# EAGLE board magnetorquer_extension_board_f1 (EAGLE 8.7.1)
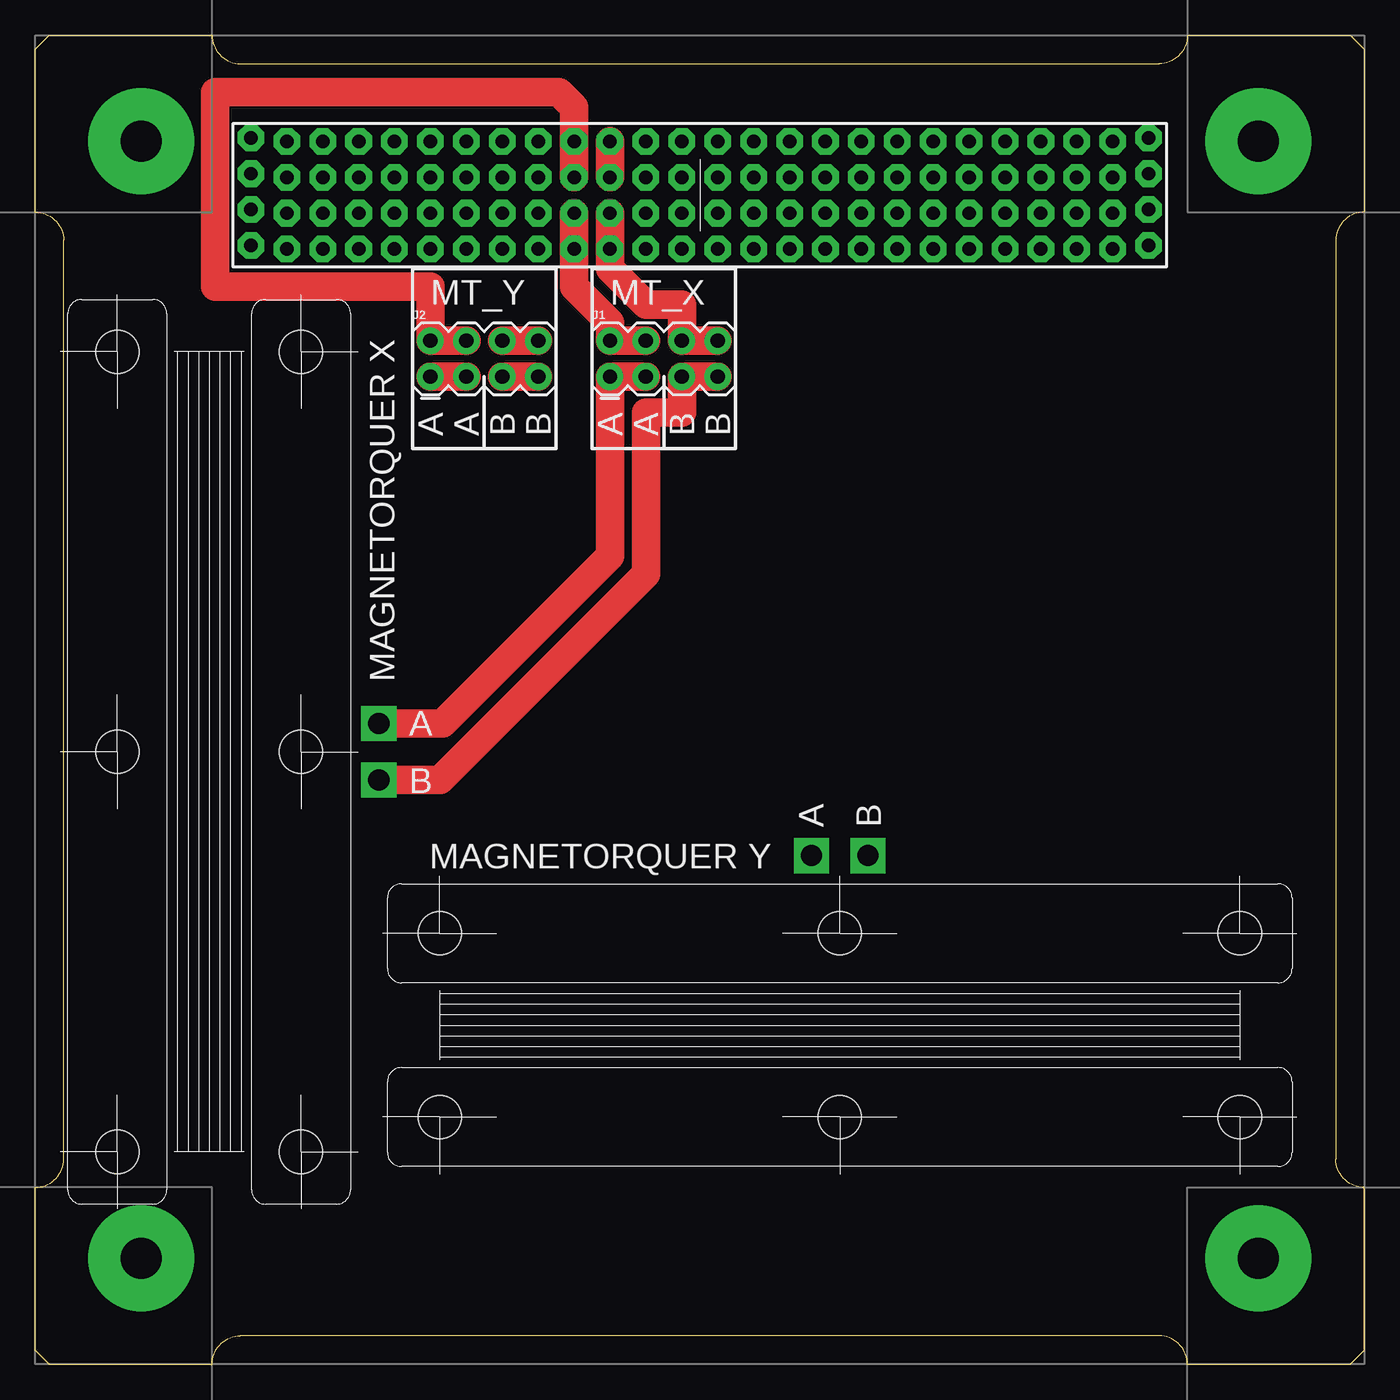
[diagram p0: board, top side]
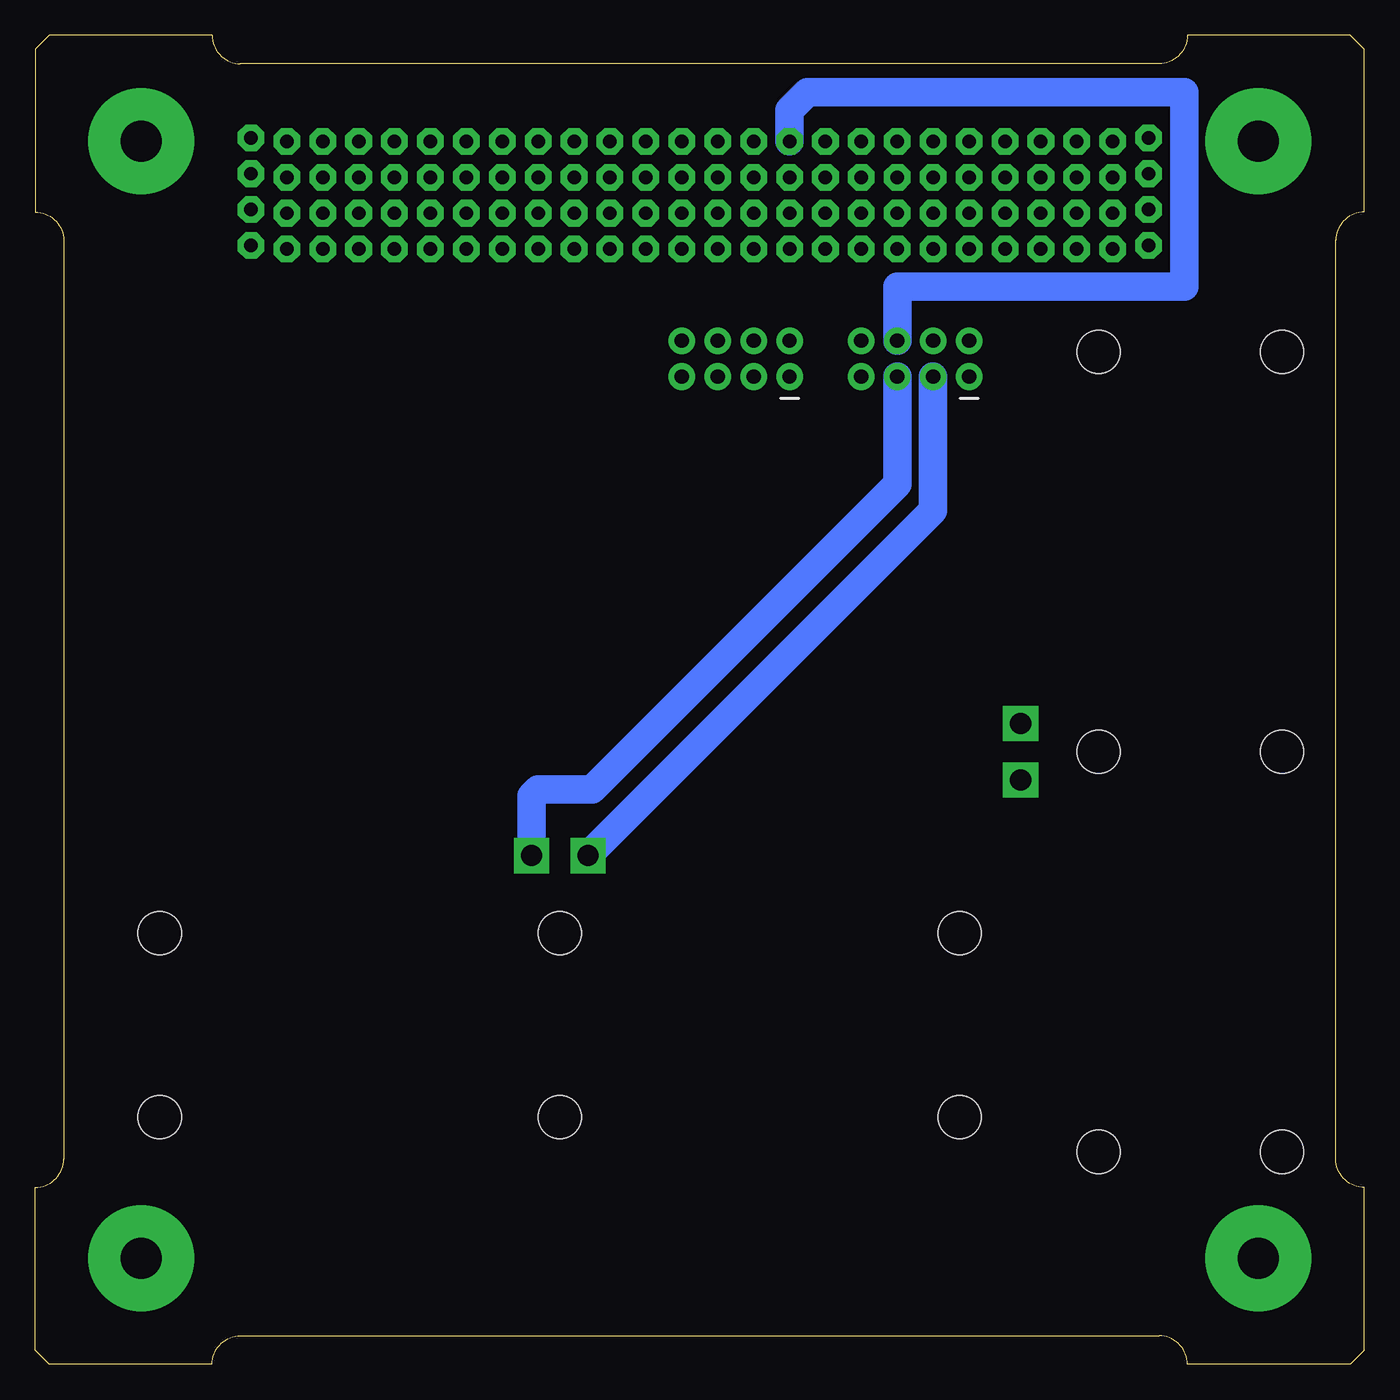
[diagram p1: board, bottom side, seen from below]

Size 94 x 94 mm. Coordinates in mm from the lower left corner, seen from the top.
Copper layers (1*16): Top 0.035mm / dielectric 1.5mm / Bottom 0.035mm
Design rules "default *": minimum track width 10mil, minimum drill 0.4mm, track to track 10mil, track to pad 10mil, pad to pad 10mil, via to via 10mil, smd to smd 6mil, copper to edge 40mil, drill to drill 6mil, minimum pad ring 10mil, minimum via ring 8mil, stop-mask expansion 4mil, vias tented up to drill 0mil, thermal gap 10mil

## Footprints (pad centres in the part's own frame; a part is rotated, then mirrored left to right if it is on the bottom)
2X4 = drill 1.016 pad 1.88: 1 -3.81,-1.27; 2 -3.81,1.27; 3 -1.27,-1.27; 4 -1.27,1.27; 5 1.27,-1.27; 6 1.27,1.27; 7 3.81,-1.27; 8 3.81,1.27
MT_AIRCORE_HORIZONTAL = drill 1.5 pad 2.5 square: A 30,22; B 34,22 | hole 3.05: 3.7,16.5; 32,16.5; 60.3,16.5; 60.3,3.5; 32,3.5; 3.7,3.5
PC104_CONNECTOR = drill 0.953 pad 1.88 octagon: P$1 -31.75,32.134; P$2 -31.75,34.674; P$3 -31.75,37.214; P$4 -31.75,39.754; P$5 -29.21,31.88; P$6 -29.21,34.42; P$7 -29.21,36.96; P$8 -29.21,39.5; P$9 -26.67,31.88; P$10 -26.67,34.42; P$11 -26.67,36.96; P$12 -26.67,39.5; P$13 -24.13,31.88; P$14 -24.13,34.42; P$15 -24.13,36.96; P$16 -24.13,39.5; P$17 -21.59,31.88; P$18 -21.59,34.42; P$19 -21.59,36.96; P$20 -21.59,39.5; P$21 -19.05,31.88; P$22 -19.05,34.42; P$23 -19.05,36.96; P$24 -19.05,39.5; P$25 -16.51,31.88; P$26 -16.51,34.42; P$27 -16.51,36.96; P$28 -16.51,39.5; P$29 -13.97,31.88; P$30 -13.97,34.42; P$31 -13.97,36.96; P$32 -13.97,39.5; P$33 -11.43,31.88; P$34 -11.43,34.42; P$35 -11.43,36.96; P$36 -11.43,39.5; P$37 -8.89,31.88; P$38 -8.89,34.42; P$39 -8.89,36.96; P$40 -8.89,39.5; P$41 -6.35,31.88; P$42 -6.35,34.42; P$43 -6.35,36.96; P$44 -6.35,39.5; P$45 -3.81,31.88; P$46 -3.81,34.42; P$47 -3.81,36.96; P$48 -3.81,39.5; P$49 -1.27,31.88; P$50 -1.27,34.42; P$51 -1.27,36.96; P$52 -1.27,39.5; P$53 1.27,31.88; P$54 1.27,34.42; P$55 1.27,36.96; P$56 1.27,39.5; P$57 3.81,31.88; P$58 3.81,34.42; P$59 3.81,36.96; P$60 3.81,39.5; P$61 6.35,31.88; P$62 6.35,34.42; P$63 6.35,36.96; P$64 6.35,39.5; P$65 8.89,31.88; P$66 8.89,34.42; P$67 8.89,36.96; P$68 8.89,39.5; P$69 11.43,31.88; P$70 11.43,34.42; P$71 11.43,36.96; P$72 11.43,39.5; P$73 13.97,31.88; P$74 13.97,34.42; P$75 13.97,36.96; P$76 13.97,39.5; P$77 16.51,31.88; P$78 16.51,34.42; P$79 16.51,36.96; P$80 16.51,39.5; P$81 19.05,31.88; P$82 19.05,34.42; P$83 19.05,36.96; P$84 19.05,39.5; P$85 21.59,31.88; P$86 21.59,34.42; P$87 21.59,36.96; P$88 21.59,39.5; P$89 24.13,31.88; P$90 24.13,34.42; P$91 24.13,36.96; P$92 24.13,39.5; P$93 26.67,31.88; P$94 26.67,34.42; P$95 26.67,36.96; P$96 26.67,39.5; P$97 29.21,31.88; P$98 29.21,34.42; P$99 29.21,36.96; P$100 29.21,39.5; P$101 31.75,32.134; P$102 31.75,34.674; P$103 31.75,37.214; P$104 31.75,39.754
BOARD_TEMPLATE_SECURED = drill 2.9 pad 7.5: P$1 -39.5,39.5; P$2 -39.5,-39.5; P$3 39.5,-39.5; P$4 39.5,39.5

## Placement (x,y rotation side)
J1  [2X4]  44.46,71.13 0 top
J2  [2X4]  31.76,71.13 0 top
MT_X  MT_AIRCORE_HORIZONTAL  [MT_AIRCORE_HORIZONTAL]  2.3,75.32 270 top
MT_Y  MT_AIRCORE_HORIZONTAL  [MT_AIRCORE_HORIZONTAL]  24.9,13.98 0 top
U$1  PC104_CONNECTOR  [PC104_CONNECTOR]  47,47 0 top
U$2  BOARD_TEMPLATESERCURED  [BOARD_TEMPLATE_SECURED]  47,47 0 top

## Library data of the parts
J1 J2 = SparkFun-Connectors
MT_X MT_Y U$1 U$2 = DubSat1 Components

## Nets
MT_X_A: J1.1 J1.3 MT_X.A
MT_X_A_STACK: J1.2 J1.4 U$1.P$37 U$1.P$38
MT_X_B: J1.5 J1.7 MT_X.B
MT_X_B_STACK: J1.6 J1.8 U$1.P$41 U$1.P$42
MT_Y_A: J2.1 J2.3 MT_Y.A
MT_Y_A_STACK: J2.2 J2.4 U$1.P$39 U$1.P$40
MT_Y_B: J2.5 J2.7 MT_Y.B
MT_Y_B_STACK: J2.6 J2.8 U$1.P$43 U$1.P$44

## Tracks (layer width: path | path; a pad name or v marks a point on that pad's centre or on a via)
MT_X_A
  Top 2.032: J1.3 J1.1 40.65,57.16 28.81,45.32 MT_X.A
MT_X_A_STACK
  Top 2.032: J1.4 J1.2 40.65,73.67 38.11,76.21 U$1.P$37 U$1.P$38
MT_X_B
  Top 2.032: J1.7 J1.5 45.73,67.32 43.19,67.32 43.19,55.89 28.62,41.32 MT_X.B
MT_X_B_STACK
  Top 2.032: J1.8 J1.6 45.73,74.94 43.19,74.94 40.65,77.48 U$1.P$41 U$1.P$42
MT_Y_A
  Top 2.032: J2.1 J2.3
  Bottom 2.032: J2.3 30.49,60.39 MT_Y.A
MT_Y_A_STACK
  Top 2.032: J2.4 J2.2 27.95,76.21 12.71,76.21 12.71,89.97 37.05,89.97 38.11,88.91 U$1.P$40 U$1.P$39
MT_Y_B
  Top 2.032: J2.5 J2.7
  Bottom 2.032: J2.5 33.03,62.24 54.62,40.65 58.43,40.65 58.9,40.18 MT_Y.B
MT_Y_B_STACK
  Top 2.032: J2.6 J2.8 | U$1.P$44 U$1.P$43
  Bottom 2.032: U$1.P$44 40.65,88.7 39.38,89.97 12.71,89.97 12.71,76.21 33.03,76.21 J2.6

## Text on the board
tSilk: MT_Y | MT_X | A | A | B | B | A | A | B | B | MAGNETORQUER X | A | B | A | B | MAGNETORQUER Y